# Altium PCB PCB_V1.PcbDoc
Units mm, origin at the board's own origin, x right, y up, seen from the top; angles counter-clockwise.
Board outline 208.53 x 21 mm, 2 copper layers (Top Layer, Bottom Layer), stack 0.08 mm thick; 7 components, 4 nets, 16 pads, 0 vias.
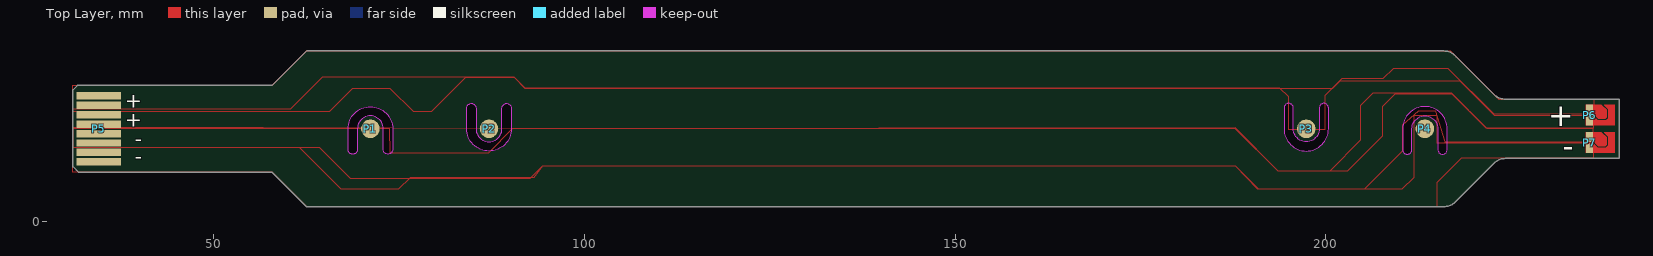
[diagram p0: Top Layer view]
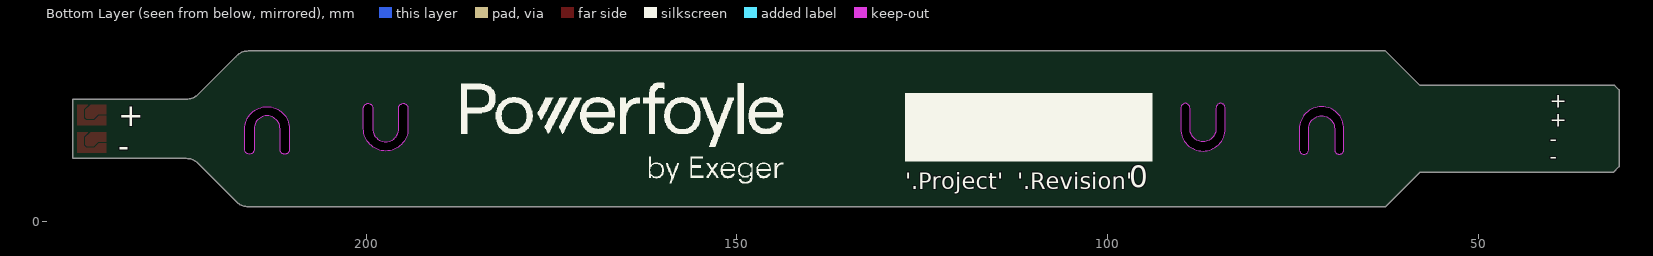
[diagram p1: Bottom Layer view, seen from below]

## Layer stack, top to bottom
Top Solder: solder mask 0.0102, Solder Resist, Dk 3.5
Top Layer: signal copper 0.035
Dielectric 1: dielectric 0.01, Kapton, Dk 4.8
Bottom Layer: signal copper 0.035
Bottom Solder: solder mask 0.0102, Solder Resist, Dk 3.5

## Board outline
31.75,6.65 31,7.4 31,17.75 31.6,18.35 57.85,18.35 62.5,23 215.869,23 cw(c215.875,20.768) 217.544,22.25 222.544,17.25 ccw(c224.213,18.732) 224.219,16.5 239.531,16.5 239.531,8.5 224.244,8.5 ccw(c224.238,6.268) 222.569,7.75 217.569,2.75 cw(c215.9,4.232) 215.894,2 62.5,2 57.85,6.65
cut-out: 200.347,12.506 200.347,15.306 ccw(c199.722,15.304) 199.097,15.306 199.097,12.506 cw(c197.347,12.503) 195.597,12.503 195.597,15.303 ccw(c194.972,15.301) 194.347,15.303 194.347,12.503 ccw(c197.347,12.503)
cut-out: 216.347,9.697 216.347,12.497 216.347,12.495 ccw(c213.347,12.5) 210.347,12.5 210.347,9.7 ccw(c210.972,9.702) 211.597,9.7 211.597,12.5 cw(c213.347,12.5) 215.097,12.497 215.097,9.697 ccw(c215.722,9.699)
cut-out: 68.116,9.694 68.116,12.494 68.116,12.491 cw(c71.116,12.497) 74.116,12.497 74.116,9.697 cw(c73.491,9.699) 72.866,9.697 72.866,12.497 ccw(c71.116,12.497) 69.366,12.494 69.366,9.694 cw(c68.741,9.696)
cut-out: 84.116,12.503 84.116,15.303 cw(c84.741,15.301) 85.366,15.303 85.366,12.503 ccw(c87.116,12.5) 88.866,12.5 88.866,15.3 cw(c89.491,15.298) 90.116,15.3 90.116,12.5 cw(c87.116,12.5)

## Design rules (kind name [scope] priority, off if disabled: settings)
BoardOutlineClearance [All] p1: gap=0.3 ignorepadtopadclearanceinfootprint=FALSE
Clearance "Clearance to cell connections" [HasFootprint('Cell_pad_6mm')] p1: gap=0.6 ignorepadtopadclearanceinfootprint=FALSE
Clearance [All] p2: gap=0.2 ignorepadtopadclearanceinfootprint=FALSE
DiffPairsRouting [All] p1: maxlimit=0.254 minlimit=0.254 mostfreqgap=0.254 substack1={AC398A8C-2EBD-4929-A576-1C4F7B57599D} toplayer_{ac398a8c-2ebd-4929-a576-1c4f7b57599d}_minwidth=0.381 toplayer_{ac398a8c-2ebd-4929-a576-1c4f7b57599d}_maxwidth=0.381 toplayer_{ac398a8c-2ebd-4929-a576-1c4f7b57599d}_prefwidth=0.381 bottomlayer_{ac398a8c-2ebd-4929-a576-1c4f7b57599d}_minwidth=0.381 bottomlayer_{ac398a8c-2ebd-4929-a576-1c4f7b57599d}_maxwidth=0.381 bottomlayer_{ac398a8c-2ebd-4929-a576-1c4f7b57599d}_prefwidth=0.381 substack2={C3FBE846-BD83-49AA-845B-1BEE8A776ADA} toplayer_{c3fbe846-bd83-49aa-845b-1bee8a776ada}_minwidth=0.381 toplayer_{c3fbe846-bd83-49aa-845b-1bee8a776ada}_maxwidth=0.381 toplayer_{c3fbe846-bd83-49aa-845b-1bee8a776ada}_prefwidth=0.381 bottomlayer_{c3fbe846-bd83-49aa-845b-1bee8a776ada}_minwidth=0.381 bottomlayer_{c3fbe846-bd83-49aa-845b-1bee8a776ada}_maxwidth=0.381 bottomlayer_{c3fbe846-bd83-49aa-845b-1bee8a776ada}_prefwidth=0.381 substack3={068A34C2-B61F-40AE-8550-B44704E20CBD} toplayer_{068a34c2-b61f-40ae-8550-b44704e20cbd}_minwidth=0.381 toplayer_{068a34c2-b61f-40ae-8550-b44704e20cbd}_maxwidth=0.381 toplayer_{068a34c2-b61f-40ae-8550-b44704e20cbd}_prefwidth=0.381 bottomlayer_{068a34c2-b61f-40ae-8550-b44704e20cbd}_minwidth=0.381 bottomlayer_{068a34c2-b61f-40ae-8550-b44704e20cbd}_maxwidth=0.381 bottomlayer_{068a34c2-b61f-40ae-8550-b44704e20cbd}_prefwidth=0.381 toplayer_minwidth=0.381 toplayer_maxwidth=0.381 toplayer_prefwidth=0.381 bottomlayer_minwidth=0.381 bottomlayer_maxwidth=0.381 bottomlayer_prefwidth=0.381 substack4={1DBF04A3-A739-4845-80F4-67AE6DF34821} toplayer_{1dbf04a3-a739-4845-80f4-67ae6df34821}_minwidth=0.381 toplayer_{1dbf04a3-a739-4845-80f4-67ae6df34821}_maxwidth=0.381 toplayer_{1dbf04a3-a739-4845-80f4-67ae6df34821}_prefwidth=0.381 bottomlayer_{1dbf04a3-a739-4845-80f4-67ae6df34821}_minwidth=0.381 bottomlayer_{1dbf04a3-a739-4845-80f4-67ae6df34821}_maxwidth=0.381 bottomlayer_{1dbf04a3-a739-4845-80f4-67ae6df34821}_prefwidth=0.381 substack5={706D0DFD-092C-4A59-9570-597311E816E1} toplayer_{706d0dfd-092c-4a59-9570-597311e816e1}_minwidth=0.381 toplayer_{706d0dfd-092c-4a59-9570-597311e816e1}_maxwidth=0.381 toplayer_{706d0dfd-092c-4a59-9570-597311e816e1}_prefwidth=0.381 bottomlayer_{706d0dfd-092c-4a59-9570-597311e816e1}_minwidth=0.381 bottomlayer_{706d0dfd-092c-4a59-9570-597311e816e1}_maxwidth=0.381 bottomlayer_{706d0dfd-092c-4a59-9570-597311e816e1}_prefwidth=0.381 substack6={F6441547-04AD-42D8-8F2E-114EB13474D3} toplayer_{f6441547-04ad-42d8-8f2e-114eb13474d3}_minwidth=0.381 toplayer_{f6441547-04ad-42d8-8f2e-114eb13474d3}_maxwidth=0.381 toplayer_{f6441547-04ad-42d8-8f2e-114eb13474d3}_prefwidth=0.381 bottomlayer_{f6441547-04ad-42d8-8f2e-114eb13474d3}_minwidth=0.381 bottomlayer_{f6441547-04ad-42d8-8f2e-114eb13474d3}_maxwidth=0.381 bottomlayer_{f6441547-04ad-42d8-8f2e-114eb13474d3}_prefwidth=0.381 substack7={D3D7B19F-2A18-4F5B-8A84-D7E783B0B577} toplayer_{d3d7b19f-2a18-4f5b-8a84-d7e783b0b577}_minwidth=0.381 toplayer_{d3d7b19f-2a18-4f5b-8a84-d7e783b0b577}_maxwidth=0.381 toplayer_{d3d7b19f-2a18-4f5b-8a84-d7e783b0b577}_prefwidth=0.381 bottomlayer_{d3d7b19f-2a18-4f5b-8a84-d7e783b0b577}_minwidth=0.381 bottomlayer_{d3d7b19f-2a18-4f5b-8a84-d7e783b0b577}_maxwidth=0.381 bottomlayer_{d3d7b19f-2a18-4f5b-8a84-d7e783b0b577}_prefwidth=0.381 substack8={33F0C8AE-5BAA-4F54-8420-C15B5188DF2B} toplayer_{33f0c8ae-5baa-4f54-8420-c15b5188df2b}_minwidth=0.381 toplayer_{33f0c8ae-5baa-4f54-8420-c15b5188df2b}_maxwidth=0.381 toplayer_{33f0c8ae-5baa-4f54-8420-c15b5188df2b}_prefwidth=0.381 bottomlayer_{33f0c8ae-5baa-4f54-8420-c15b5188df2b}_minwidth=0.381 bottomlayer_{33f0c8ae-5baa-4f54-8420-c15b5188df2b}_maxwidth=0.381 bottomlayer_{33f0c8ae-5baa-4f54-8420-c15b5188df2b}_prefwidth=0.381 substack9={5DEA7FFC-9C65-4E3C-AA6C-196D072506BA} toplayer_{5dea7ffc-9c65-4e3c-aa6c-196d072506ba}_minwidth=0.381 toplayer_{5dea7ffc-9c65-4e3c-aa6c-196d072506ba}_maxwidth=0.381 toplayer_{5dea7ffc-9c65-4e3c-aa6c-196d072506ba}_prefwidth=0.381 bottomlayer_{5dea7ffc-9c65-4e3c-aa6c-196d072506ba}_minwidth=0.381 bottomlayer_{5dea7ffc-9c65-4e3c-aa6c-196d072506ba}_maxwidth=0.381 bottomlayer_{5dea7ffc-9c65-4e3c-aa6c-196d072506ba}_prefwidth=0.381 maxuncoupledlength=12.7
PolygonConnect [All] p1: connectstyle=Direct reliefconductorwidth=0.254 reliefentries=4 polygonreliefangle="90 Angle" airgapwidth=0.254
RoutingVias [All] p1: holewidth=0.711 width=1.27 viastyle="Through Hole" minholewidth=0.711 minwidth=1.27 maxholewidth=0.711 maxwidth=1.27
SolderMaskExpansion [All] p1: expansion=0.102 istentingtop=FALSE
UnRoutedNet [All] p1: checkbadconnections=TRUE
Width [All] p1: maxlimit=10 minlimit=0.2 preferedwidth=2 substack1={AC398A8C-2EBD-4929-A576-1C4F7B57599D} substack2={C3FBE846-BD83-49AA-845B-1BEE8A776ADA} substack3={068A34C2-B61F-40AE-8550-B44704E20CBD} substack4={1DBF04A3-A739-4845-80F4-67AE6DF34821} substack5={706D0DFD-092C-4A59-9570-597311E816E1} substack6={F6441547-04AD-42D8-8F2E-114EB13474D3} substack7={D3D7B19F-2A18-4F5B-8A84-D7E783B0B577} substack8={33F0C8AE-5BAA-4F54-8420-C15B5188DF2B} substack9={5DEA7FFC-9C65-4E3C-AA6C-196D072506BA}
28 further rules are at their usual default settings.

## Components (designator, comment, footprint, x,y, rotation, side; value= is the part's Value field where it differs from the comment)
P1 "Cell connection" Cell_pad_2.5mm 71.116,12.5 r0 top
P2 "Cell connection" Cell_pad_2.5mm 87.116,12.5 r0 top
P3 "Cell connection" Cell_pad_2.5mm 197.347,12.5 r0 top
P4 "Cell connection" Cell_pad_2.5mm 213.347,12.5 r0 top
P5 "Exeger IV-test" EXEGER_IV_8_PIN_NO_STIFF 34.5,16.935 r0 top
P6 "Customer conn, solder short" Customer_2022_solder_short 237.05,14.35 r0 top
P7 "Customer conn, solder short" Customer_2022_solder_short 237.05,10.65 r0 top

## Footprints (in the part's own frame and the unit in brackets; to place one, negate y for a bottom-side part, rotate by r counter-clockwise, add the part's x,y. Pads: shape width x height; smd on the part's side, far side on the other; paste and mask are expansions set on the pad)
Cell_pad_2.5mm [mm]
  round 2.5 smd mask+0.3: 1(0,0)
Customer_2022_solder_short [mm]
  rect 1x1.3 smd paste-2 mask+0: 1(-1.5,0.75) 2(-1.5,-0.75)
  Top Layer region: -2,-1.4 1.9,-1.4 1.9,1.4 0.5,1.4 0.5,1.3 1,0.8 1,-0.4 0.7,-0.7 -0.4,-0.7 -1,-0.1 -2,-0.1
  Top Layer region: -2,1.4 0.1,1.4 0.8,0.7 0.8,-0.3 0.6,-0.5 -0.3,-0.5 -0.9,0.1 -2,0.1
EXEGER_IV_8_PIN_NO_STIFF [mm] "TE  4-487576-9 mating"
  rect 6x1 smd paste-2 mask+0.1: 1(0,0) 2(0,-1.27) 3(0,-2.54) 4(0,-3.81) 5(0,-5.08) 6(0,-6.35) 7(0,-7.62) 8(0,-8.89)

## Part data
P1 P2 P3 P4: library part "Cell connection 1P"
P5: library part "Header 8", "Header, 8-Pin"
P6 P7: library part "Header 2", "Header, 2-Pin"

## Nets (pads, with @x,y where several pads share a name; then routed paths per layer and width w, separated by ;. In a path a pad name is that pad's centre, name@x,y a point inside that pad or via, vN(x,y) a via of type N, cw(c..) or ccw(c..) an arc to the next point about the centre after c; other vN are vias at no path point)
N_1: P1.1 P5.5 P5.6 P7.1
N_2: P4.1 P5.7 P5.8 P7.2
P_1: P2.1 P5.3 P5.4 P6.2
P_2: P3.1 P5.1 P5.2 P6.1

## Polygon pours and split planes (outlines as drawn)
N_2 on Top Layer "NONET_L01_P006" (solid, remove dead copper, shelved, pour order 6): 211.899,14.356 214.975,14.356 214.975,10.625 221.885,10.625 236.066,10.625 236.066,8.5 218.248,8.5 214.975,5.227 214.975,2 191,2 62.5,2 57.85,6.65 31,6.65 31,10 61.509,10 67.109,4.4 74.95,4.4 76.54,5.99 93.25,5.99 94.35,7.5 187.75,7.5 190.76,4.4 210.309,4.4 211.899,5.99
N_1 on Top Layer "NONET_L01_P004" (solid, remove dead copper, shelved, pour order 4): 31,12.514 31,10 64.225,10 68.425,5.8 92.65,5.8 94.35,7.5 187.75,7.5 190.85,4.4 205.225,4.4 210.347,9.522 210.347,13.061 212.488,14.925 214.736,14.925 216.021,10.727 222.017,10.727 236.066,10.727 236.066,12.5 221.769,12.5 217.005,17.194 209.294,17.194 207.6,15.5 207.6,11.496 202.904,6.8 193.6,6.8 187.75,12.497 90.283,12.519 86.989,9.225 73.78,9.225 73.725,12.497 72.35,12.496 72.35,12.514 69.875,12.514 61.713,12.512
P_1 on Top Layer "NONET_L01_P002" (solid, remove dead copper, shelved, pour order 2): 196.5,6.8 193.6,6.8 187.772,12.628 91.5,12.5 56.689,12.628 31,12.628 31,14.875 65.628,14.875 68.753,18 73.75,18 76.875,14.875 79.425,14.875 83.975,19.425 90.525,19.425 91.95,18 194.4,18 200.9,18 201.9,19 218.038,19 222.723,14.356 236.025,14.356 236.025,12.575 221.65,12.575 216.941,17.284 206.334,17.284 204.65,15.6 204.65,10.95 200.5,6.8
P_2 on Top Layer "NONET_L01_P000" (solid, remove dead copper, shelved, pour order 0): 216.525,20.625 209.075,20.625 207.675,19.225 202.102,19.225 199.854,16.954 199.854,12.4 194.972,12.4 194.972,16.828 193.8,18 92,18 90.55,19.45 83.45,19.45 64.591,19.449 60.282,15.14 31,15.14 31,18.35 57.85,18.35 62.5,23 216.794,23 223.294,16.5 236.1,16.5 236.1,14.45 222.7,14.45

## Silkscreen, mask and mechanical layers (free items; w line width, h text height)
Top Overlay:
  text "+" at 40.325,15.35 h2
  text "+" at 233.45,12.85 h3
  text "+" at 40.325,12.8 h2
  text "-" at 40.325,10.125 h2
  text "-" at 233.45,8.75 h3
  text "-" at 40.325,7.8 h2
Bottom Overlay:
  drawing of 21 lines, arcs and shapes, not listed
  text "+" at 40.325,15.35 h2
  text "+" at 233.45,12.85 h3
  text "+" at 40.325,12.8 h2
  text "-" at 40.325,10.125 h2
  text "-" at 233.45,8.75 h3
  text "-" at 40.325,7.8 h2
  text "'.Project'  '.Revision'" at 127.3,4.325 h2.2
  text "0" at 97.05,3.575 h5
Cell drawing:
  circle w0.013: c197.347,12.497 r7
  circle w0.013: c87.116,12.497 r7
  circle w0.013: c71.116,12.497 r7
  circle w0.013: c213.347,12.497 r7
  circle w0.013: c213.349,12.497 r7
  circle w0.013: c213.349,12.497 r8
  circle w0.013: c71.116,12.497 r8
Mech notes:
  rectangle: 203.1,7.25 230.1,17.75
Board Outline:
  lines w0.2: 68.116,12.494 68.116,9.694 ccw(c68.741,9.696) 69.366,9.694 69.366,12.494 cw(c71.116,12.497) 72.866,12.497 72.866,9.697 ccw(c73.491,9.699) 74.116,9.697 74.116,12.497 ccw(c71.116,12.497) 68.116,12.491 ; 84.116,12.503 84.116,15.303 cw(c84.741,15.301) 85.366,15.303 85.366,12.503 ccw(c87.116,12.5) 88.866,12.5 88.866,15.3 cw(c89.491,15.298) 90.116,15.3 90.116,12.5 cw(c87.116,12.5) 84.116,12.505 ; 200.347,12.503 200.347,15.303 ccw(c199.722,15.301) 199.097,15.303 199.097,12.503 cw(c197.347,12.5) 195.597,12.5 195.597,15.3 ccw(c194.972,15.298) 194.347,15.3 194.347,12.5 ccw(c197.347,12.5) 200.347,12.505 ; 216.347,12.491 ccw(c213.347,12.497) 210.347,12.497 210.347,9.697 ccw(c210.972,9.699) 211.597,9.697 211.597,12.497 cw(c213.347,12.497) 215.097,12.494 215.097,9.694 ccw(c215.722,9.696) 216.347,9.694 216.347,12.494 ; 57.85,6.65 62.5,2 215.894,2 ccw(c215.9,4.232) 217.569,2.75 222.569,7.75 cw(c224.238,6.268) 224.244,8.5 239.531,8.5 239.531,16.5 224.219,16.5 cw(c224.213,18.732) 222.544,17.25 217.544,22.25 ccw(c215.875,20.768) 215.869,23 62.5,23 ; 57.85,6.65 57.85,6.65 ; 57.85,6.65 31.75,6.65 31,7.4 31,17.75 31.6,18.35 57.85,18.35 62.5,23 ; 62.5,23 62.5,23